# EAGLE board Lab7 (EAGLE 7.0.0)

Size 100 x 80 mm. Coordinates in mm from the lower left corner, seen from the top.
Outline: 0,0 100,0 100,80 0,80 0,0
Copper layers (1*16): Top 0.035mm / dielectric 1.5mm / Bottom 0.035mm
Design rules "default": minimum track width 10mil, minimum drill 24mil, track to track 8mil, track to pad 8mil, pad to pad 8mil, via to via 8mil, smd to smd 8mil, copper to edge 40mil, drill to drill 8mil, minimum pad ring 10mil, minimum via ring 8mil, stop-mask expansion 4mil, vias tented up to drill 0mil, thermal gap 10mil
Net classes: 0 default: clearance 0.205 mm

## Footprints (pad centres in the part's own frame; a part is rotated, then mirrored left to right if it is on the bottom)
TP2 = drill 0.8: MP 0,0; MP1 2.54,0
CAP200MIL = drill 0.8: 1 -2.54,0; 2 2.54,0
ST7735 = drill 1 square: 1 -10.16,-30.48 | drill 1 long: 2 -7.62,-30.48; 3 -5.08,-30.48; 4 -2.54,-30.48; 5 0,-30.48; 6 2.54,-30.48; 7 5.08,-30.48; 8 7.62,-30.48; 9 10.16,-30.48; 10 12.7,-30.48 | hole 3: -13.335,20.32; 15.875,20.32
78XXS = drill 1.1 long: GND 0,-2.54; IN -2.54,-2.54; OUT 2.54,-2.54
1X06 = drill 0.8 square: 1 -6.35,0 | drill 0.8 octagon: 2 -3.81,0; 3 -1.27,0; 4 1.27,0; 5 3.81,0; 6 6.35,0
LED5MM = drill 0.8 pad 1.676: A -1.27,0 | drill 0.8 pad 1.676 square: K 1.27,0
TO92 = drill 0.8: 1 -1.27,0; 2 0,1.905; 3 1.27,0
TO220BH = drill 1.118 long: D 0,-6.35; G -2.54,-6.35; S 2.54,-6.35 | hole 3.302: 0,11.176
RES300MIL = drill 0.8: 1 -3.81,0; 2 3.81,0
0204V = drill 0.813 octagon: 1 -1.27,0; 2 1.27,0
B3F-10XX = drill 1.1 long: 1 -3.251,2.261; 2 3.251,2.261; 3 -3.251,-2.261; 4 3.251,-2.261
TM4C123LAUNCHPAD = drill 0.8 square: 1 -22.86,12.7 | drill 0.8: 2 -22.86,10.16; 3 -22.86,7.62; 4 -22.86,5.08; 5 -22.86,2.54; 6 -22.86,0; 7 -22.86,-2.54; 8 -22.86,-5.08; 9 -22.86,-7.62; 10 -22.86,-10.16; 11 22.86,-10.16; 12 22.86,-7.62; 13 22.86,-5.08; 14 22.86,-2.54; 15 22.86,0; 16 22.86,2.54; 17 22.86,5.08; 18 22.86,7.62; 19 22.86,10.16; 20 22.86,12.7; 21 -20.32,12.7; 22 -20.32,10.16; 23 -20.32,7.62; 24 -20.32,5.08; 25 -20.32,2.54; 26 -20.32,0; 27 -20.32,-2.54; 28 -20.32,-5.08; 29 -20.32,-7.62; 30 -20.32,-10.16; 31 20.32,-10.16; 32 20.32,-7.62; 33 20.32,-5.08; 34 20.32,-2.54; 35 20.32,0; 36 20.32,2.54; 37 20.32,5.08; 38 20.32,7.62; 39 20.32,10.16; 40 20.32,12.7

## Placement (x,y rotation side)
+3.3V  TP2  [TP2]  -97.79,146.05 0 top  (outside the outline)
+5V  TP2  [TP2]  -104.14,146.05 0 top  (outside the outline)
C1  10 uF  [CAP200MIL]  -31.75,148.59 0 top  (outside the outline)
C2  10 uF  [CAP200MIL]  -39.37,148.59 0 top  (outside the outline)
DIS1  ST7735  [ST7735]  -31.75,34.29 0 top  (outside the outline)
GND  TP2  [TP2]  -16.51,153.67 0 top  (outside the outline)
IC1  LM7805  [78XXS]  -57.15,129.54 0 top  (outside the outline)
NXT_MOTOR  [1X06]  -57.15,147.32 0 top  (outside the outline)
POWER  RED  [LED5MM]  -24.13,148.59 0 top  (outside the outline)
Q1  PN2222  [TO92]  -76.2,147.32 0 top  (outside the outline)
Q2  PN2222  [TO92]  -90.17,147.32 0 top  (outside the outline)
Q3  IRF522  [TO220BH]  -34.29,129.54 0 top  (outside the outline)
Q4  IRF522  [TO220BH]  -45.72,129.54 0 top  (outside the outline)
Q5  FQP27P06  [TO220BH]  -99.06,97.79 0 top  (outside the outline)
Q6  FQP27P06  [TO220BH]  -22.86,129.54 0 top  (outside the outline)
R1  470  [RES300MIL]  -24.13,153.67 0 top  (outside the outline)
R2  1k  [RES300MIL]  -34.29,153.67 0 top  (outside the outline)
R3  1k  [RES300MIL]  -44.45,153.67 0 top  (outside the outline)
R4  10k  [RES300MIL]  -54.61,153.67 0 top  (outside the outline)
R5  10k  [RES300MIL]  -64.77,153.67 0 top  (outside the outline)
R7  10k  [0204V]  -45.72,148.59 0 top  (outside the outline)
R9  10k  [RES300MIL]  -74.93,153.67 0 top  (outside the outline)
R10  10k  [RES300MIL]  -85.09,153.67 0 top  (outside the outline)
START/STOP  [B3F-10XX]  -72.39,124.46 0 top  (outside the outline)
TILT_BACK  [B3F-10XX]  -85.09,124.46 0 top  (outside the outline)
TILT_FOR  [B3F-10XX]  -96.52,124.46 0 top  (outside the outline)
U$1  EK-TM4C1294XL_BOOST2  [TM4C123LAUNCHPAD]  -63.5,71.12 0 top  (outside the outline)
U$2  EK-TM4C1294XL_BOOST1  [TM4C123LAUNCHPAD]  -63.5,102.87 0 top  (outside the outline)

## Library data of the parts
+3.3V +5V C1 C2 GND IC1 NXT_MOTOR POWER Q1 Q2 R1-R5 R9 R10 U$1 U$2 = EE445L
DIS1 = EE445L; OC_FARNELL: unknown; OC_NEWARK: unknown
Q3-Q6 = transistor-power
R7 = rcl
START/STOP TILT_BACK TILT_FOR = EE445L; MPN: B3F-1000; OC_FARNELL: 176432; OC_NEWARK: 36M3542

## Nets
+3.3V: +3.3V.MP +3.3V.MP1 DIS1.2 DIS1.10 U$1.1 U$2.1
+3V3: START/STOP.3 TILT_BACK.3 TILT_FOR.3
+5V: +5V.MP +5V.MP1 C1.1 IC1.OUT R1.1 U$1.21 U$2.21
+VBATT: C2.1 IC1.IN NXT_MOTOR.1 Q5.S Q6.S R4.2 R5.2
ANY_PIN: DIS1.6
ENC_A: NXT_MOTOR.5
ENC_B: NXT_MOTOR.6
FORWARD: Q1.3 Q3.G Q5.G R4.1
GND: C1.2 C2.2 DIS1.1 GND.MP GND.MP1 IC1.GND NXT_MOTOR.2 POWER.K Q1.1 Q2.1 Q3.S Q4.S R7.1 R9.1 R10.1 U$1.22 U$2.22
GND2: U$1.20 U$2.20
M+: NXT_MOTOR.3 Q3.D Q5.D
M-: NXT_MOTOR.4 Q4.D Q6.D
N$1: R3.1
N$2: R2.2
N$3: Q1.2 R3.2
N$4: Q2.2 R2.1
N$5: R9.2 TILT_FOR.2
N$6: R10.2 TILT_BACK.2
N$7: POWER.A R1.2
N$10: TILT_BACK.1
PA2: DIS1.8 U$1.14
PA3: DIS1.5 U$1.15
PA4: DIS1.9 U$1.29
PA5: DIS1.7 U$1.30
PA6: DIS1.4 U$2.28
PA7: DIS1.3 U$1.17
PB2: R7.2 START/STOP.1
PB3: TILT_FOR.1
REVERSE: Q2.3 Q4.G Q6.G R5.1

## Tracks (layer width: path | path; a pad name or v marks a point on that pad's centre or on a via)
+3.3V  (5 unrouted)
+3V3  (2 unrouted)
+5V  (6 unrouted)
+VBATT  (6 unrouted)
FORWARD  (3 unrouted)
GND  (16 unrouted)
GND2  (1 unrouted)
M+  (2 unrouted)
M-  (2 unrouted)
N$3  (1 unrouted)
N$4  (1 unrouted)
N$5  (1 unrouted)
N$6  (1 unrouted)
N$7  (1 unrouted)
PA2  (1 unrouted)
PA3  (1 unrouted)
PA4  (1 unrouted)
PA5  (1 unrouted)
PA6  (1 unrouted)
PA7  (1 unrouted)
PB2  (1 unrouted)
REVERSE  (3 unrouted)